# Altium PCB Wilkinson_Power_Divider.PcbDoc
Units mm, origin at the board's own origin, x right, y up, seen from the top; angles counter-clockwise.
Board outline 18.99 x 60.33 mm, 2 copper layers (Top Layer, Bottom Layer); 1 components, 0 nets, 5 pads, 0 vias.
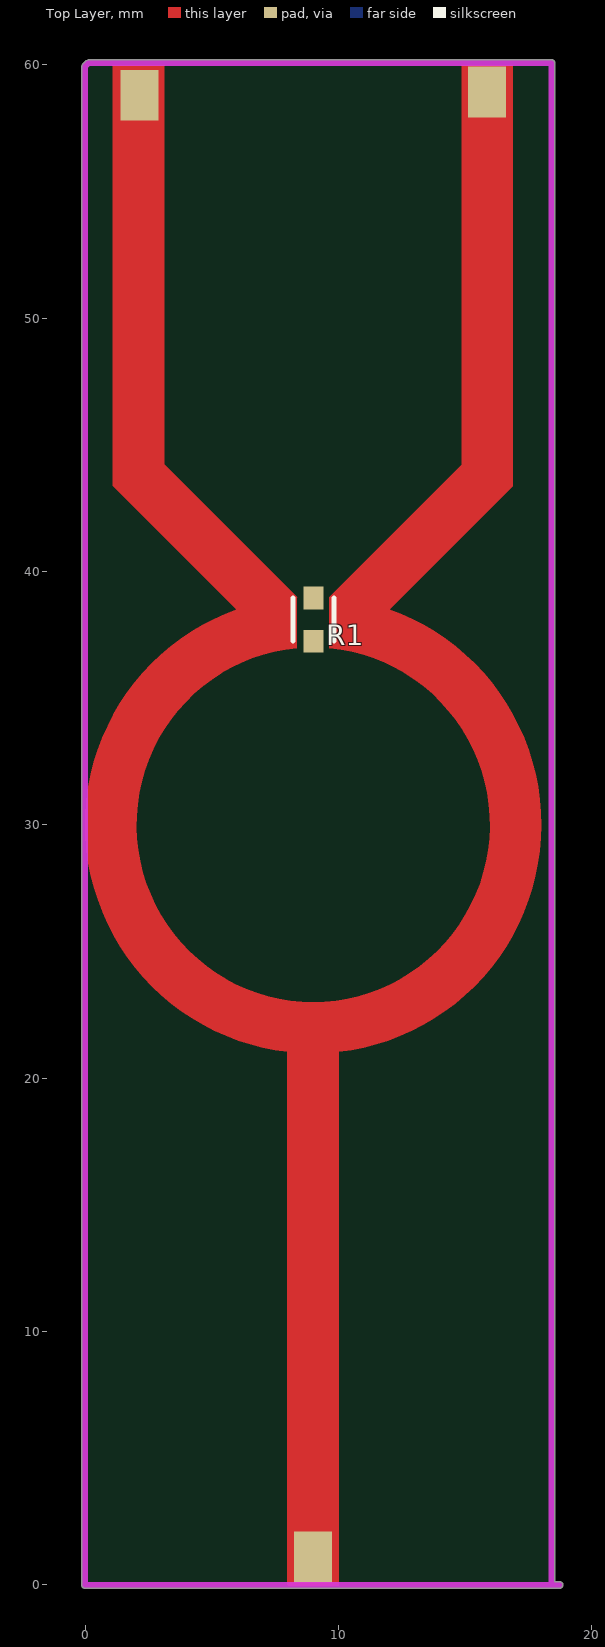
[diagram p0: Top Layer view]
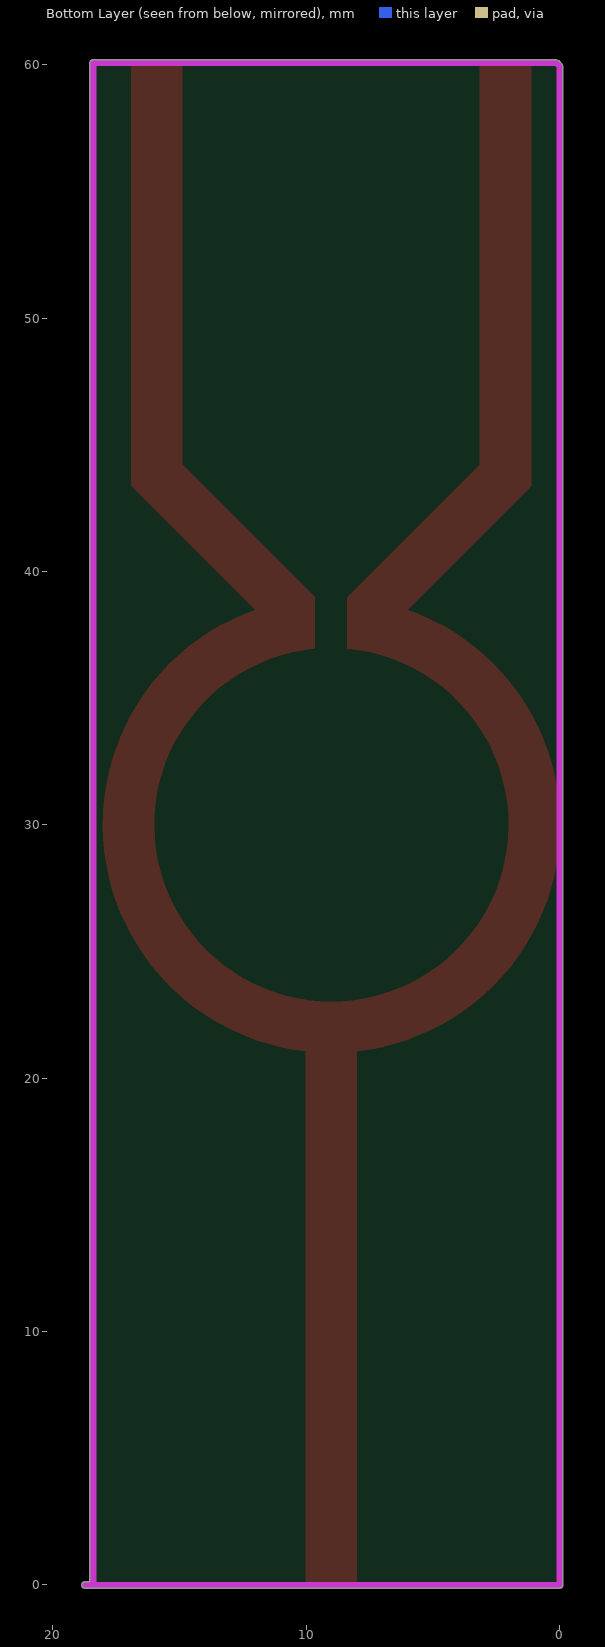
[diagram p1: Bottom Layer view, seen from below]

## Layer stack, top to bottom
Top Solder: solder mask 0.0102, Solder Resist, Dk 3.5
Top Layer: signal copper 0.0356
Dielectric 1: dielectric 0.32, FR-4, Dk 4.8
Bottom Layer: signal copper 0.0356
Bottom Solder: solder mask 0.0102, Solder Resist, Dk 3.5

## Board outline
0,-0.127 cw(c0,0) -0.127,0 -0.127,59.944 -0.09,60.034 0.037,60.161 0.127,60.198 18.415,60.198 cw(c18.415,60.071) 18.542,60.071 18.542,0.127 18.732,0.127 cw(c18.732,0) 18.86,0 cw(c18.732,0) 18.732,-0.127

## Design rules (kind name [scope] priority, off if disabled: settings)
Clearance [All] p1: gap=0.254 ignorepadtopadclearanceinfootprint=FALSE
PolygonConnect [All] p1: connectstyle=Relief reliefconductorwidth=0.254 reliefentries=4 polygonreliefangle="90 Angle" airgapwidth=0.254
RoutingVias [All] p1: holewidth=0.711 width=1.27 viastyle="Through Hole" minholewidth=0.711 minwidth=1.27 maxholewidth=0.711 maxwidth=1.27
SolderMaskExpansion [All] p1: expansion=0.102 istentingtop=FALSE
Width [All] p1: maxlimit=0.254 minlimit=0.254 preferedwidth=0.254
30 further rules are at their usual default settings.

## Components (designator, comment, footprint, x,y, rotation, side; value= is the part's Value field where it differs from the comment)
R1 "Comment" FP-RT0603-MFG 9.017,38.1 r90 top

## Footprints (in the part's own frame and the unit in brackets; to place one, negate y for a bottom-side part, rotate by r counter-clockwise, add the part's x,y. Pads: shape width x height; smd on the part's side, far side on the other; paste and mask are expansions set on the pad)
FP-RT0603-MFG [mm]
  rect 0.9x0.8 smd paste+0 mask+0: 1(-0.85,0) 2(0.85,0)
  silkscreen extent -0.85,-0.81 0.86,0.8, body extent -1.4,-0.55 1.4,0.55, height 0.25

## Free pads (board coordinates)
  rect 1.5x2 smd: 1(9.006,1.102) 2(15.875,58.928) 3(2.159,58.801)

## Nets (pads, with @x,y where several pads share a name; then routed paths per layer and width w, separated by ;. In a path a pad name is that pad's centre, name@x,y a point inside that pad or via, vN(x,y) a via of type N, cw(c..) or ccw(c..) an arc to the next point about the centre after c; other vN are vias at no path point)
pads on no net: R1.1 R1.2
copper on no net: | length 236.6
  Top Layer w0.013: 0.064,28.985 ccw(c9.006,30.006) 8.006,21.062 8.006,0.006 10.006,0.006 10.006,21.062 ccw(c9.006,30.006) 17.948,28.985 ccw(c9.006,30.006) 11.997,38.495 16.889,43.387 16.889,59.983 14.889,59.983 14.889,44.215 9.656,38.983 9.656,36.976 cw(c9.006,30.006) 9.006,23.006 cw(c9.006,30.006) 8.356,36.976 8.356,38.983 3.124,44.215 3.124,59.983 1.124,59.983 1.124,43.387 6.016,38.495 ccw(c9.006,30.006) 0.064,28.985

## Keep-outs
Keep-Out Layer:
  lines w0.254: 0,19.431 0,26.416 ; 18.415,0 18.732,0 ; 18.415,0 18.732,0 ; 18.415,0 0,0 0,59.944 0.127,60.071 18.415,60.071 18.415,50.459 18.415,0 ; 18.732,0 18.732,0

## Other copper
Top Layer:
  region: 8.006,0.006 8.006,21.062 cw(c9.006,30.006) 0.064,28.985 cw(c9.006,30.006) 6.016,38.495 1.124,43.387 1.124,59.983 3.124,59.983 3.124,44.215 8.356,38.983 8.356,36.976 ccw(c9.006,30.006) 9.006,23.006 ccw(c9.006,30.006) 9.656,36.976 9.656,38.983 14.889,44.215 14.889,59.983 16.889,59.983 16.889,43.387 11.997,38.495 cw(c9.006,30.006) 17.948,28.985 cw(c9.006,30.006) 10.006,21.062 10.006,0.006